# EAGLE board touche_server (EAGLE 9.6.2)
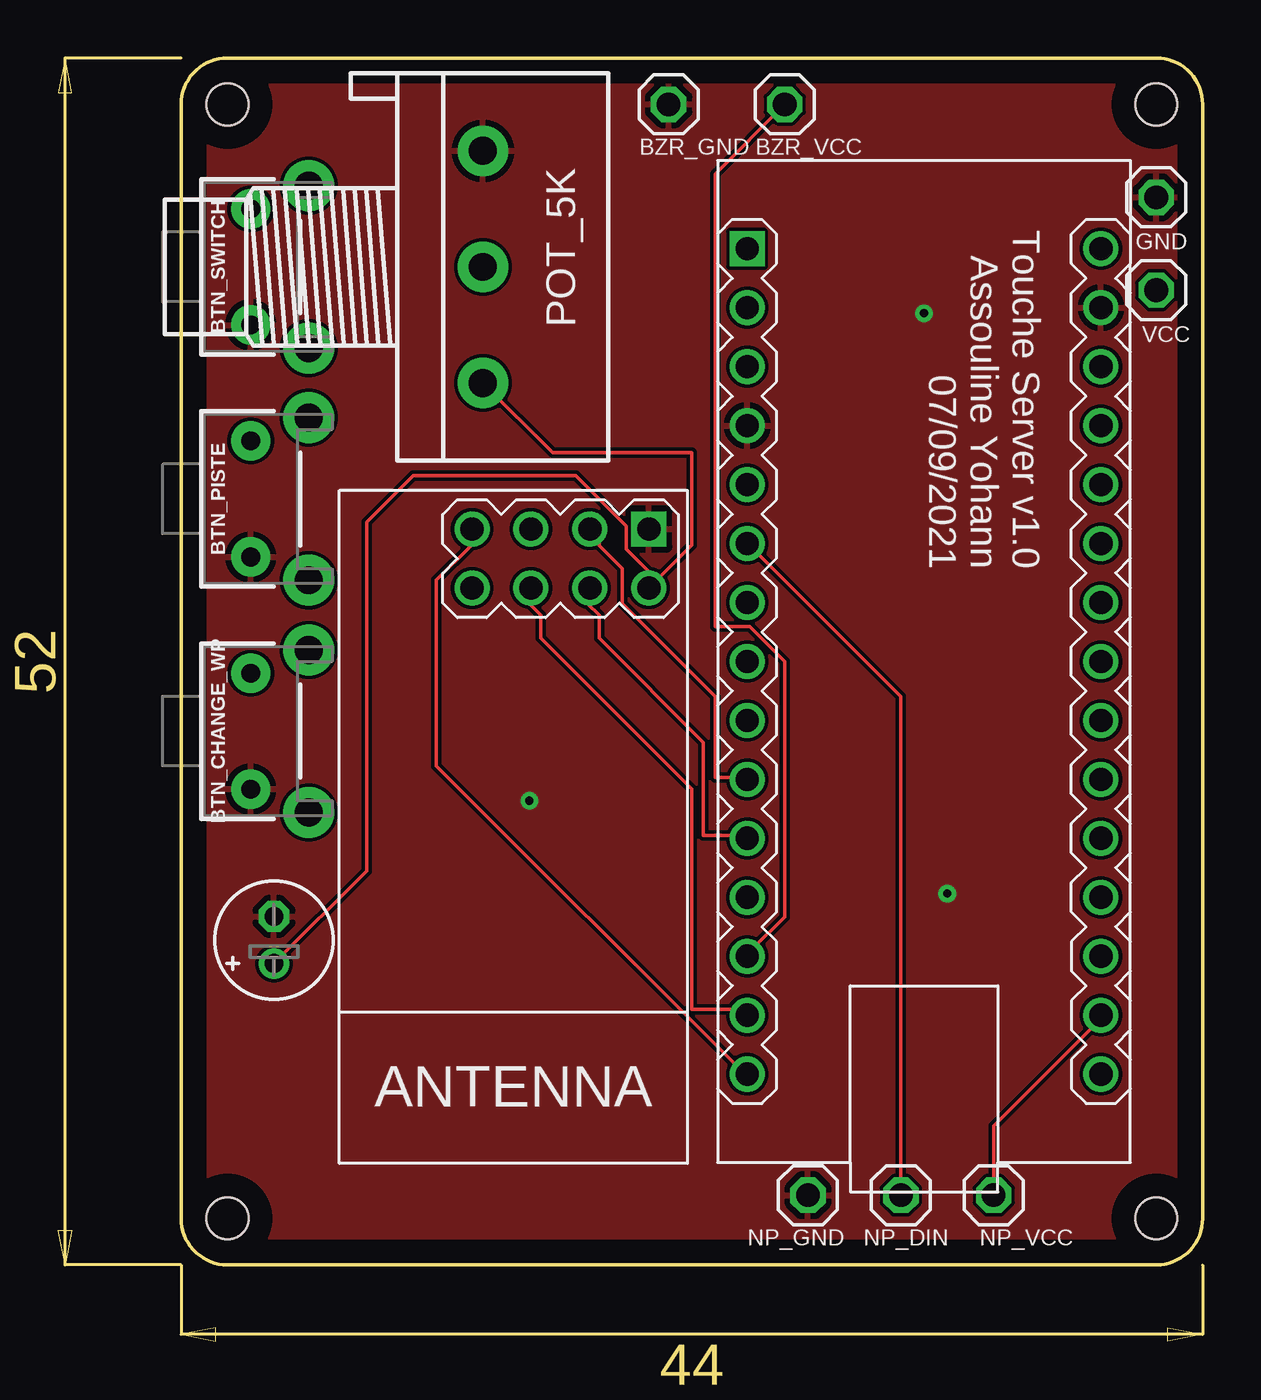
[diagram p0: board, top side]
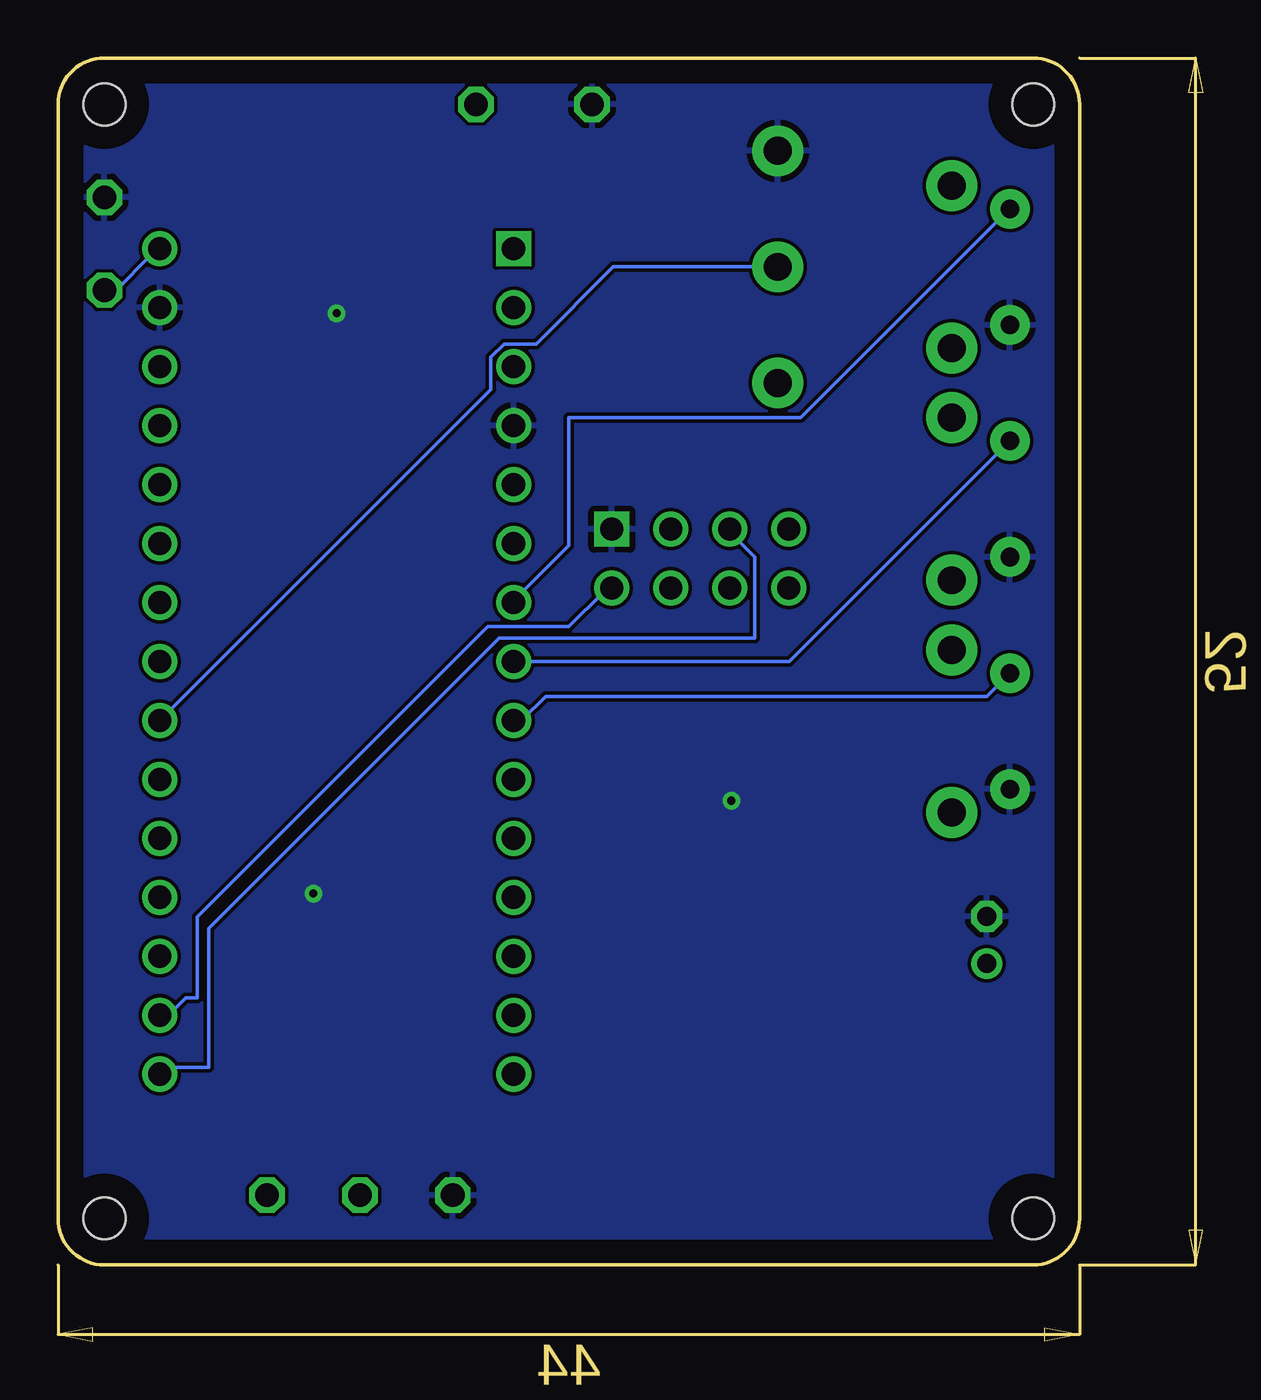
[diagram p1: board, bottom side, seen from below]

Size 44 x 52 mm. Coordinates in mm from the lower left corner, seen from the top.
Outline: 42,0 2,0 arc-90 0,2 0,50 arc-90 2,52 42,52 arc-90 44,50 44,2 arc-90 42,0
Copper layers (1*16): Top 0.035mm / dielectric 1.5mm / Bottom 0.035mm
Design rules "default": minimum track width 6mil, minimum drill 0.35mm, track to track 6mil, track to pad 6mil, pad to pad 6mil, via to via 6mil, smd to smd 6mil, copper to edge 40mil, drill to drill 6mil, minimum pad ring 10mil, minimum via ring 8mil, stop-mask expansion 4mil, vias tented up to drill 0mil, thermal gap 10mil
Holes 1.8 mm at 42,50 2,2 2,50 42,2

## Footprints (pad centres in the part's own frame; a part is rotated, then mirrored left to right if it is on the bottom)
TACTILE_SWITCH_PTH_RIGHT_ANGLE_KIT = drill 0.8 pad 1.7: 1 -2.5,0; 2 2.5,0 | drill 1.2 pad 2.2: ANCHOR1 -3.5,2.5; ANCHOR2 3.5,2.5
1X01 = drill 1.016 octagon: 1 0,0
E2-5 = drill 0.813 pad 1.27: + -1.016,0 | drill 0.813 pad 1.27 octagon: - 1.016,0
ARDUINO-NANO-3.0 = drill 1 square: J1.1 17.78,7.62 | drill 1: J1.2 15.24,7.62; J1.3 12.7,7.62; J1.4 10.16,7.62; J1.5 7.62,7.62; J1.6 5.08,7.62; J1.7 2.54,7.62; J1.8 0,7.62; J1.9 -2.54,7.62; J1.10 -5.08,7.62; J1.11 -7.62,7.62; J1.12 -10.16,7.62; J1.13 -12.7,7.62; J1.14 -15.24,7.62; J1.15 -17.78,7.62; J2.1 17.78,-7.62; J2.2 15.24,-7.62; J2.3 12.7,-7.62; J2.4 10.16,-7.62; J2.5 7.62,-7.62; J2.6 5.08,-7.62; J2.7 2.54,-7.62; J2.8 0,-7.62; J2.9 -2.54,-7.62; J2.10 -5.08,-7.62; J2.11 -7.62,-7.62; J2.12 -10.16,-7.62; J2.13 -12.7,-7.62; J2.14 -15.24,-7.62; J2.15 -17.78,-7.62
WIRELESS-NRF24L01 = drill 1 square: 1 -12.7,6.35 | drill 1: 2 -10.16,6.35; 3 -12.7,3.81; 4 -10.16,3.81; 5 -12.7,1.27; 6 -10.16,1.27; 7 -12.7,-1.27; 8 -10.16,-1.27
3RP/1610N = drill 1.2 pad 2.184: 1 -5,0; 2 0,0; 3 5,0

## Placement (x,y rotation side)
BTN_CHANGE_WP  MOMENTARY-SWITCH-SPST-PTH-RIGHT-ANGLE-KIT  [TACTILE_SWITCH_PTH_RIGHT_ANGLE_KIT]  3,23 270 top
BTN_PISTE  MOMENTARY-SWITCH-SPST-PTH-RIGHT-ANGLE-KIT  [TACTILE_SWITCH_PTH_RIGHT_ANGLE_KIT]  3,33 270 top
BTN_SWITCH  MOMENTARY-SWITCH-SPST-PTH-RIGHT-ANGLE-KIT  [TACTILE_SWITCH_PTH_RIGHT_ANGLE_KIT]  3,43 270 top
BZR_GND  BZR_GND  [1X01]  21,50 0 top
BZR_VCC  BZR_VCC  [1X01]  26,50 0 top
C1  10uF  [E2-5]  4,14 90 top
GND  GND  [1X01]  42,46 0 top
M1  ARDUINO-NANO-3.0  [ARDUINO-NANO-3.0]  32,26 90 top
M2  WIRELESS-NRF24L01  [WIRELESS-NRF24L01]  13.8,19 270 top
NP_DIN  NP_DIN  [1X01]  31,3 0 top
NP_GND  NP_GND  [1X01]  27,3 0 top
NP_VCC  NP_VCC  [1X01]  35,3 0 top
POT_5K  [3RP/1610N]  13,43 270 top
VCC  VCC  [1X01]  42,42 0 top

## Library data of the parts
BTN_CHANGE_WP BTN_PISTE BTN_SWITCH = SparkFun-Switches; PROD_ID: CONN-10672; SF_SKU: COM-10791
BZR_GND BZR_VCC GND NP_DIN NP_GND NP_VCC VCC = pinhead
C1 = rcl; SPICEPREFIX: C
M1 M2 = wsff_lib
POT_5K = pot

## Nets
5V: M1.J2.4
BZR_DIN: BZR_VCC.1 M1.J1.13
CE_NRF: M1.J1.10 M2.3
CSN_NRF: M1.J1.11 M2.4
GND: BTN_CHANGE_WP.2 BTN_PISTE.2 BTN_SWITCH.2 BZR_GND.1 C1.- GND.1 M1.J1.4 M1.J2.2 M2.1 NP_GND.1 POT_5K.1
MISO_NRF: M1.J1.15 M2.7
MOSI_NRF: M1.J1.14 M2.6
NEOPIXEL_DIN: M1.J1.6 NP_DIN.1
PIN_BTN_CHANGE_WEAPON: BTN_CHANGE_WP.1 M1.J1.9
PIN_BTN_PISTE_MODE: BTN_PISTE.1 M1.J1.8
PIN_BTN_SWITCH_SIDE: BTN_SWITCH.1 M1.J1.7
POT_IN: M1.J2.9 POT_5K.2
SCK_NRF: M1.J2.15 M2.5
VCC: C1.+ M1.J2.14 M2.2 NP_VCC.1 POT_5K.3
VCC_IN: M1.J2.1 VCC.1

## Tracks (layer width: path | path; a pad name or v marks a point on that pad's centre or on a via)
BZR_DIN
  Top 0.152: BZR_VCC.1 23,47 23,27.5 24.5,27.5 26,26 26,15 24.5,13.5 M1.J1.13
CE_NRF
  Top 0.152: M1.J1.10 24,21 23,21 23,24.5 19,28.5 19,30 18,31 18,31.5 M2.3
CSN_NRF
  Top 0.152: M1.J1.11 24,18.5 22.5,18.5 22.5,22.5 18,27 18,28 17.5,28.5 17.5,29 M2.4
GND  (via drill 0.35)
  other vias: 32,41 15,20 33,16
  pour Bottom: 42,0 2,0 arc-90 0,2 0,50 arc-90 2,52 42,52 arc-90 44,50 44,2 arc-90
  pour Top: 42,0 2,0 arc-90 0,2 0,50 arc-90 2,52 42,52 arc-90 44,50 44,2 arc-90
MISO_NRF
  Top 0.152: M1.J1.15 24,8.5 11,21.5 11,29.5 12.5,31 12.5,31.5 M2.7
MOSI_NRF
  Top 0.152: M1.J1.14 24,11 22,11 22,20.5 15.5,27 15.5,28 15,28.5 15,29 M2.6
NEOPIXEL_DIN
  Top 0.152: NP_DIN.1 31,24.5 24.5,31 M1.J1.6
PIN_BTN_CHANGE_WEAPON
  Bottom 0.152: BTN_CHANGE_WP.1 4,24.5 23,24.5 24,23.5 M1.J1.9
PIN_BTN_PISTE_MODE
  Bottom 0.152: M1.J1.8 12.5,26 BTN_PISTE.1
PIN_BTN_SWITCH_SIDE
  Bottom 0.152: BTN_SWITCH.1 12,36.5 22,36.5 22,31 24,29 M1.J1.7
POT_IN
  Bottom 0.152: POT_5K.2 20.08,43 23.4,39.68 24.79,39.68 25.36,39.11 25.36,37.72 M1.J2.9
SCK_NRF
  Bottom 0.152: M2.5 15,31.5 14,30.5 14,27 25,27 37.5,14.5 37.5,8.5 39.5,8.5 M1.J2.15
VCC
  Top 0.152: NP_VCC.1 35,6 39.5,10.5 M1.J2.14 | C1.+ 8,16.98 8,32 10,34 17,34 19.17,31.83 19.17,30.85 20.15,29.87 M2.2 22,31.01 22,35 16,35 POT_5K.3
  Bottom 0.152: M2.2 20.5,29 22,27.5 25.5,27.5 38,15 38,11.5 38.5,11.5 39,11 39.5,11 M1.J2.14
VCC_IN
  Bottom 0.152: VCC.1 41.5,42 40,43.5 M1.J2.1

## Text on the board
tPlace: Touche Server v1.0 / Assouline Yohann / 07/09/2021